# Altium PCB ice.PcbDoc (part 1 of 2)
Units mm, origin at the board's own origin, x right, y up, seen from the top; angles counter-clockwise.
Board outline 65 x 30 mm, 4 copper layers (Top Layer, GND, L3, Bottom Layer), stack 1.576 mm thick; 116 components, 101 nets, 444 pads, 153 vias.
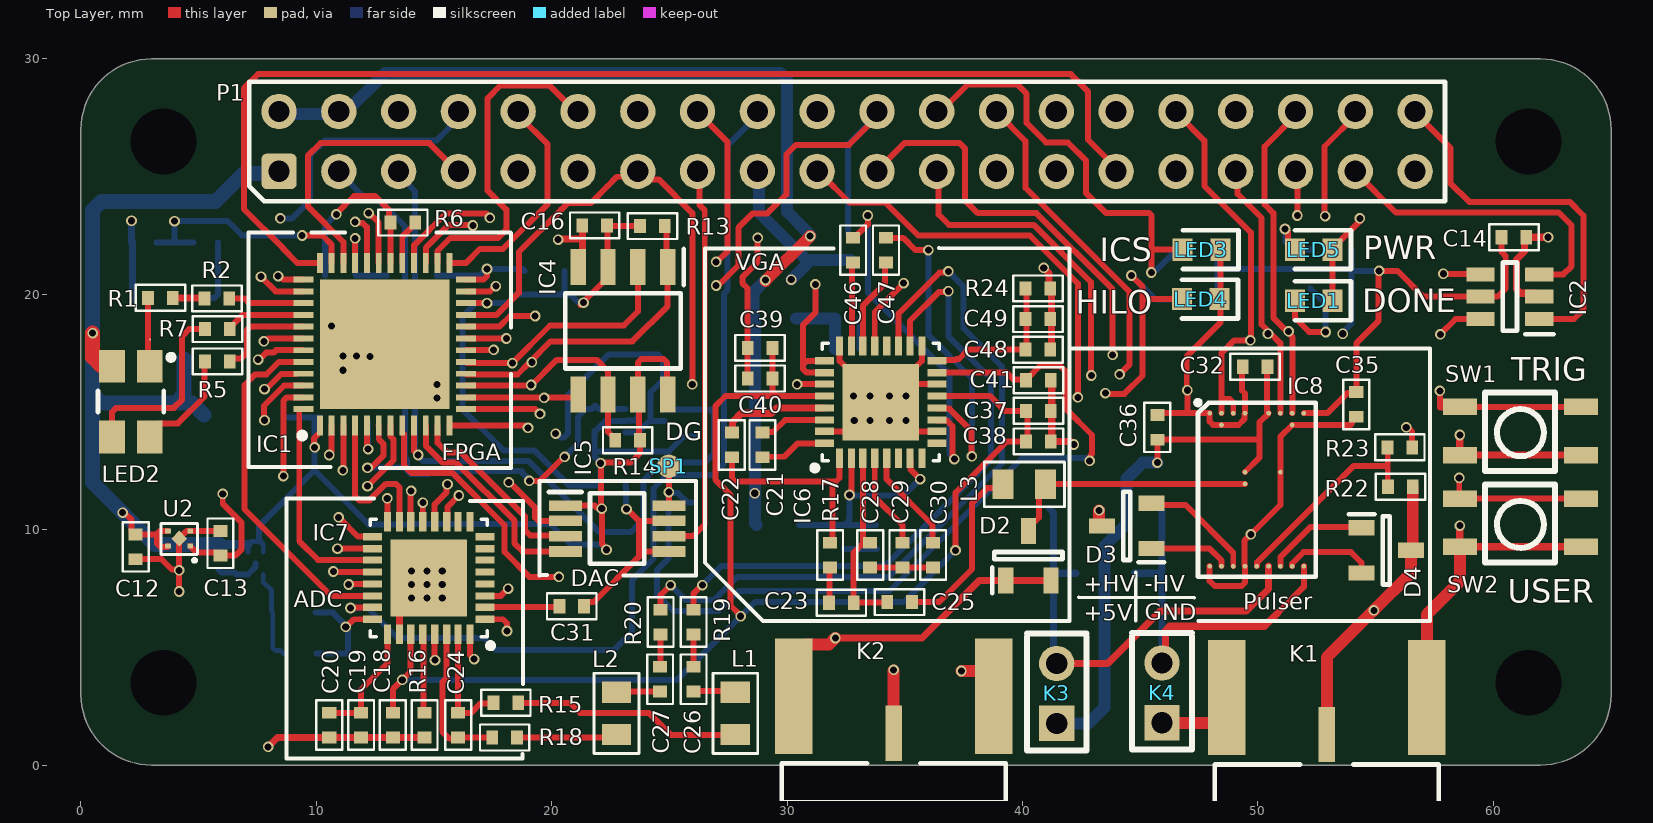
[diagram p0: Top Layer view]
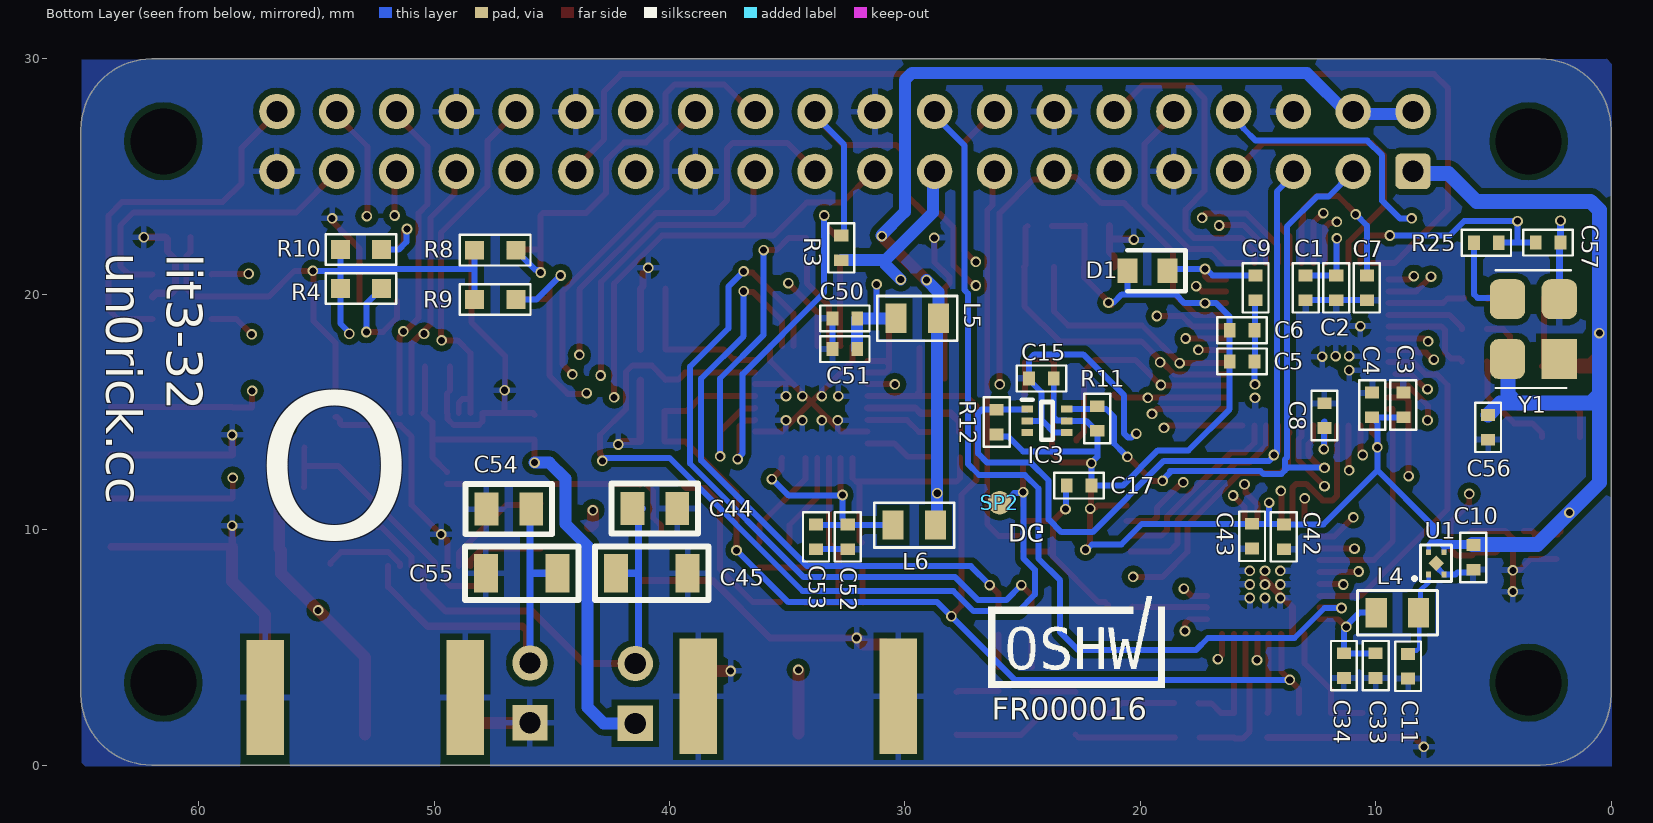
[diagram p1: Bottom Layer view, seen from below]
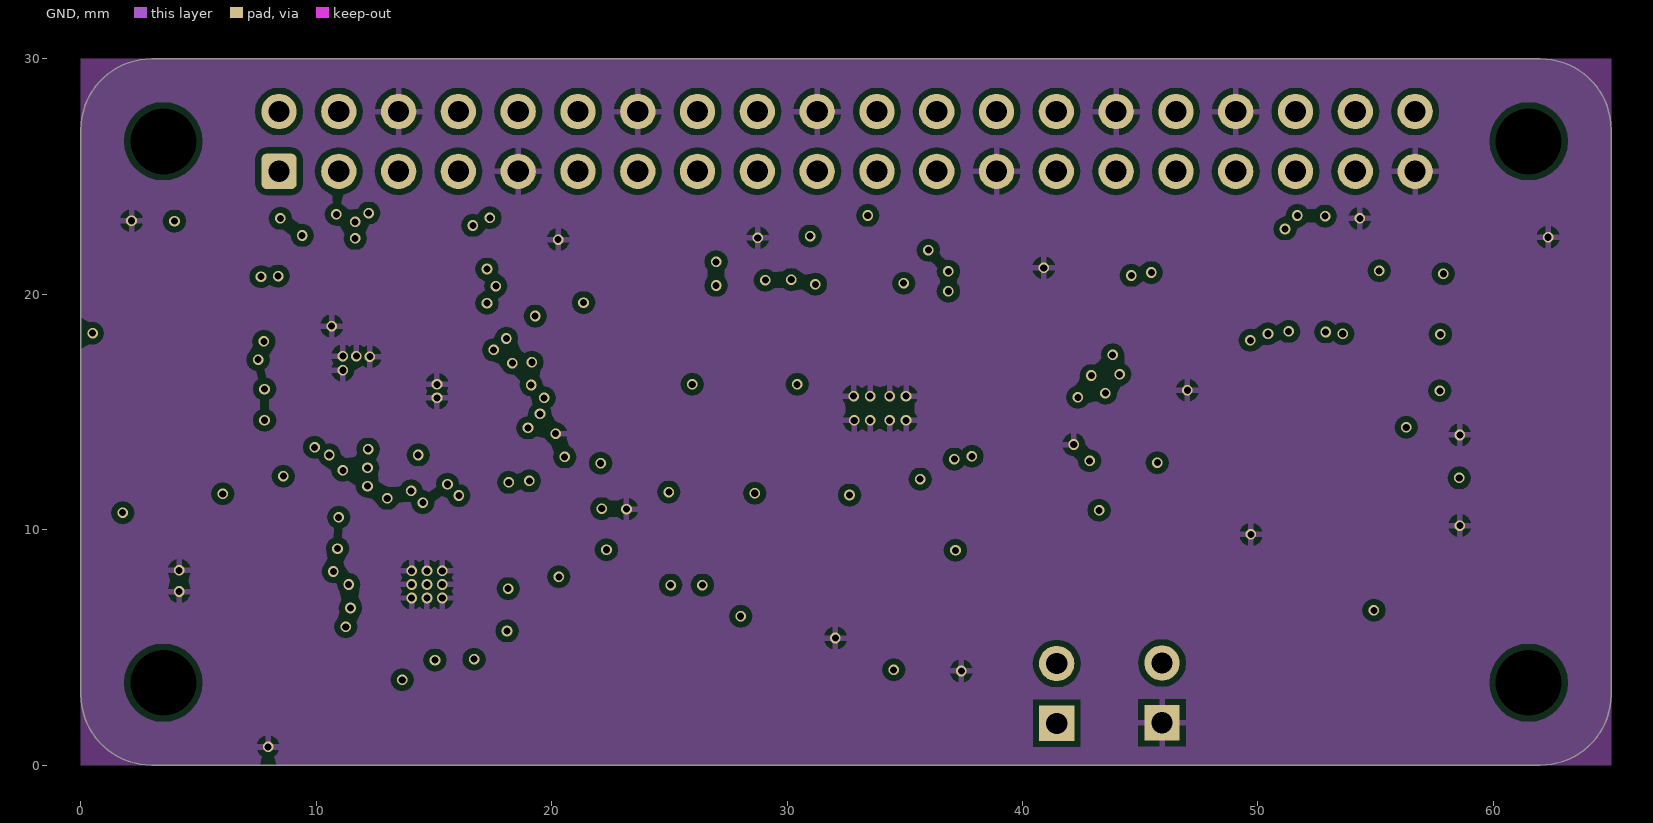
[diagram p2: GND]
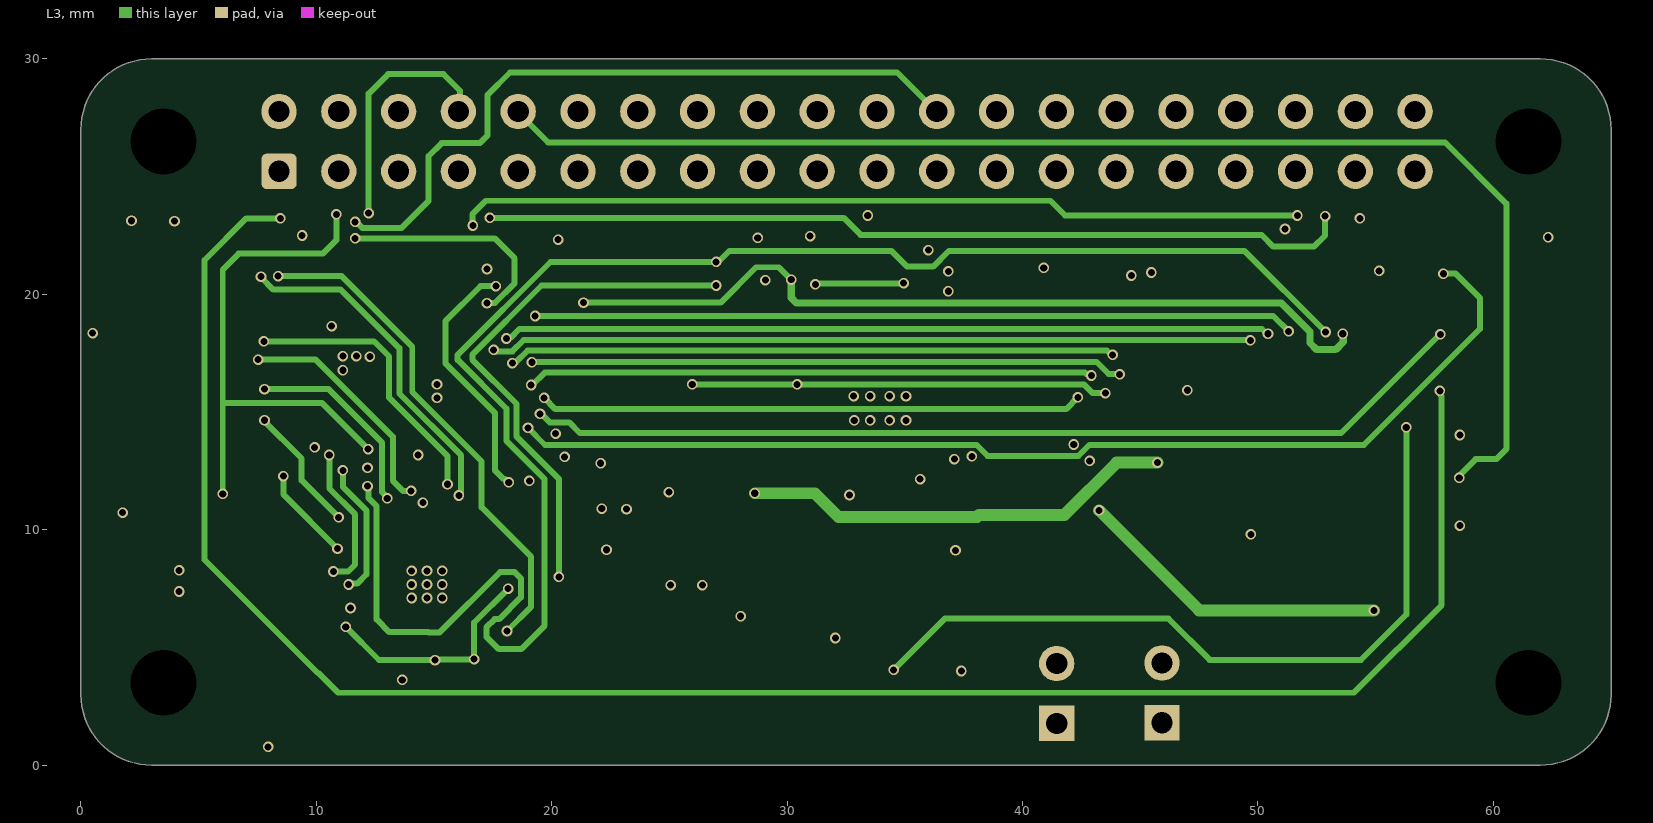
[diagram p3: L3]

## Layer stack, top to bottom
Top Solder: solder mask 0.0102, Solder Resist, Dk 3.5
Top Layer: signal copper 0.0356
Dielectric 2: prepreg 0.1524, PP-018, Dk 4.3
GND: signal copper 0.035
Dielectric 1: dielectric 1.13, FR-4, Dk 4.8
L3: signal copper 0.035
Dielectric 3: prepreg 0.1524, PP-018, Dk 4.3
Bottom Layer: signal copper 0.0356
Bottom Solder: solder mask 0.0102, Solder Resist, Dk 3.5

## Board outline
0,3 0,27 cw(c3,27) 3,30 62,30 cw(c62,27) 65,27 65,3 cw(c62,3) 62,0 3,0 cw(c3,3)

## Design rules (kind name [scope] priority, off if disabled: settings)
Clearance Clearance_3 [InPolygon] p1: gap=0.254 ignorepadtopadclearanceinfootprint=FALSE
Clearance [All] p2: gap=0.18 ignorepadtopadclearanceinfootprint=FALSE except(0: Arc-Hole Track-Hole SMDPad-Hole THPad-Hole Via-Hole Fill-Hole Poly-Hole Region-Hole Text-Hole; 0.1: Arc-SMDPad Track-SMDPad SMDPad-SMDPad; 0.129: Arc-Via Track-Via)
ComponentClearance [All] p1: gap=0.1 collisioncheckmode=3 verticalgap=0.1 showdistances=FALSE
HoleSize [All] p1 off: absolutevalues=TRUE maxlimit=2.54 minlimit=0.025 maxpercent=80.000 minpercent=20.000
MinimumSolderMaskSliver [All] p1: minsoldermaskwidth=0
PasteMaskExpansion [All] p1: expansion=0.05
PolygonConnect PolygonConnect_1 [All] p1: connectstyle=Relief reliefconductorwidth=0.254 reliefentries=4 polygonreliefangle="90 Angle" airgapwidth=0.254
RoutingVias [All] p1: holewidth=0.3 width=0.45 viastyle="Through Hole" minholewidth=0.3 minwidth=0.45 maxholewidth=0.3 maxwidth=0.45
SilkToSilkClearance [All] p1: silktosilkclearance=0
SolderMaskExpansion [All] p1: expansion=0.102 istentingtop=FALSE
Width [All] p1: maxlimit=3.048 minlimit=0.18 preferedwidth=0.18
25 further rules are at their usual default settings.

## Components (designator, comment, footprint, x,y, rotation, side; value= is the part's Value field where it differs from the comment)
C1 "cap0402" SM0402_3D_cap 12.975,20.275 r90 bottom value=100n
C2 "cap0402" SM0402_3D_cap 11.675,20.275 r90 bottom value=10u
C3 "cap0402" SM0402_3D_cap 8.825,15.3 r270 bottom value=100n
C4 "cap0402" SM0402_3D_cap 10.15,15.3 r270 bottom value=10u
C5 "cap0402" SM0402_3D_cap 15.675,17.15 r0 bottom value=100n
C6 "cap0402" SM0402_3D_cap 15.675,18.475 r0 bottom value=10u
C7 "cap0402" SM0402_3D_cap 10.375,20.275 r90 bottom value=100n
C8 "cap0402" SM0402_3D_cap 12.175,14.85 r270 bottom value=100n
C9 "cap0402" SM0402_3D_cap 15.1,20.275 r90 bottom value=100n
C10 "cap0402" SM0402_3D_cap 5.85,8.825 r90 bottom value=100n
C11 "cap0402" SM0402_3D_cap 8.625,4.2 r90 bottom value=1u
C12 "cap0402" SM0402_3D_cap 2.325,9.275 r90 top value=100n
C13 "cap0402" SM0402_3D_cap 5.925,9.425 r270 top value=1u
C14 "cap0402" SM0402_3D_cap 60.875,22.425 r0 top value=100n
C15 "cap0402" SM0402_3D_cap 24.2,16.425 r0 bottom value=100n
C16 "cap0402" SM0402_3D_cap 21.825,22.925 r180 top value=100n
C17 "cap0402" SM0402_3D_cap 22.6,11.875 r180 bottom value=100n
C18 "cap0402" SM0402_3D_cap 13.25,1.7 r270 top value=100n
C19 "cap0402" SM0402_3D_cap 11.9,1.7 r270 top value=100n
C20 "cap0402" SM0402_3D_cap 10.55,1.7 r270 top value=10u
C21 "cap0402" SM0402_3D_cap 28.95,13.6 r270 top value=100n
C22 "cap0402" SM0402_3D_cap 27.65,13.6 r270 top value=100n
C23 "cap0402" SM0402_3D_cap 32.3,6.9 r180 top value=18n
C24 "cap0402" SM0402_3D_cap 16.025,1.7 r90 top value=18p
C25 "cap0402" SM0402_3D_cap 34.775,6.925 r0 top value=100n
C26 "cap0402" SM0402_3D_cap 26.025,3.65 r90 top value=100n
C27 "cap0402" SM0402_3D_cap 24.6,3.65 r90 top value=100n
C28 "cap0402" SM0402_3D_cap 33.525,8.925 r270 top value=22p
C29 "cap0402" SM0402_3D_cap 34.9,8.925 r270 top value=100n
C30 "cap0402" SM0402_3D_cap 36.2,8.925 r270 top value=100n
C31 "cap0402" SM0402_3D_cap 20.85,6.75 r0 top value=100n
C32 "cap0402" SM0402_3D_cap 49.875,16.925 r180 top value=100n
C33 "cap0402" SM0402_3D_cap 10,4.225 r90 bottom value=100n
C34 "cap0402" SM0402_3D_cap 11.35,4.225 r90 bottom value=10u
C35 "cap0402" SM0402_3D_cap 54.175,15.325 r270 top value=100n
C36 "cap0402" SM0402_3D_cap 45.725,14.35 r90 top value=100n
C37 "cap0402" SM0402_3D_cap 40.675,15.05 r180 top value=100n
C38 "cap0402" SM0402_3D_cap 40.675,13.75 r180 top value=1n
C39 "cap0402" SM0402_3D_cap 28.85,17.725 r0 top value=100n
C40 "cap0402" SM0402_3D_cap 28.85,16.425 r0 top value=1n
C41 "cap0402" SM0402_3D_cap 40.675,16.35 r180 top value=1n
C42 "cap0402" SM0402_3D_cap 13.9,9.7 r90 bottom value=100n
C43 "cap0402" SM0402_3D_cap 15.25,9.725 r90 bottom value=10u
C44 "cap0805" SM0805 39.67,10.9 r0 bottom value=0.1x200V
C45 "cap1206" SM1206 39.227,8.15 r0 bottom value=0.1x200V
C46 "cap0402" SM0402_3D_cap 32.8,21.875 r270 top value=100n
C47 "cap0402" SM0402_3D_cap 34.2,21.875 r270 top value=100n
C48 "cap0402" SM0402_3D_cap 40.65,17.65 r180 top value=100n
C49 "cap0402" SM0402_3D_cap 40.65,18.95 r180 top value=1n
C50 "cap0402" SM0402_3D_cap 32.55,18.975 r180 bottom value=100n
C51 "cap0402" SM0402_3D_cap 32.55,17.675 r180 bottom value=1n
C52 "cap0402" SM0402_3D_cap 32.425,9.7 r90 bottom value=100n
C53 "cap0402" SM0402_3D_cap 33.775,9.7 r90 bottom value=1n
C54 "cap0805" SM0805 45.87,10.875 r0 bottom value=0.1x200V
C55 "cap1206" SM1206 44.75,8.15 r0 bottom value=0.1x200V
C56 "cap0402" SM0402_3D_cap 5.225,14.35 r270 bottom value=100n
C57 "cap0402" SM0402_3D_cap 2.675,22.2 r180 bottom value=6p8
D1 "CDBU0520" DIOC1709X85N 19.7,21 r0 bottom
D2 "MMBD7000HS-7-F" SOT96P240X110-3N 40.25,8.9 r90 top
D3 "MMBD7000HS-7-F" SOT96P240X110-3N 44.425,10.16 r180 top
D4 "MMBD7000HS-7-F" SOT96P240X110-3N 55.45,9.125 r0 top
IC1 "ICE40UP5K-SG48ITR" QFN50P700X700X100-49N-D 12.9,17.875 r90 top
IC2 "SN74LVC2G17DBVR" SOT95P280X145-6N 60.7,19.9 r180 top
IC3 "TMP112AIDRLR" SOTFL50P160X60-6N 23.962,14.625 r180 bottom
IC4 "W25X10CLSNIG" SOIC127P600X175-8N 23.025,18.45 r270 top
IC5 "MCP4812-E_MS" SOP65P490X110-8N 22.775,10.05 r0 top
IC6 "AD8332ACPZ-R7" QFN50P500X500X100-33N 33.975,15.425 r90 top
IC7 "AD9629BCPZ-65" QFN50P500X500X100-33N 14.775,7.95 r180 top
IC8 "HV7361GA-G" BGA22C50P9X14_500X700X105 49.95,11.7 r0 top
K1 "SMA_Edge" AMPHENOL_132357-11 52.925,1.3 r90 top
K2 "SMA_Edge" AMPHENOL_132357-11 34.525,1.35 r90 top
K3 "1x2PLS" JUMPER2 41.45,1.775 r180 top
K4 "1x2PLS" JUMPER2 45.925,1.8 r180 top
L1 "75R@100MHz" "SM_0805_INDUCTANCE _3D" 27.8,2.2 r270 top
L2 "75R@100MHz" "SM_0805_INDUCTANCE _3D" 22.75,2.2 r270 top
L3 "75R@100MHz" "SM_0805_INDUCTANCE _3D" 40.075,11.925 r180 top
L4 "75R@100MHz" "SM_0805_INDUCTANCE _3D" 9.075,6.475 r180 bottom
L5 "75R@100MHz" "SM_0805_INDUCTANCE _3D" 29.475,18.975 r180 bottom
L6 "75R@100MHz" "SM_0805_INDUCTANCE _3D" 29.6,10.2 r0 bottom
LED1 "HSMW-C191" LEDC1608X70N 52.375,19.725 r180 top
LED2 "CLVBA-FKA-CAEDH8BBB7A363" CLVBAFKACAEDH8BBB7A363 2.125,15.445 r270 top
LED3 "HSMW-C191" LEDC1608X70N 47.6,21.9 r180 top
LED4 "HSMW-C191" LEDC1608X70N 47.575,19.8 r180 top
LED5 "HSMW-C191" LEDC1608X70N 52.375,21.9 r180 top
P1 "2x20 2.54mm vertical" PLD-40 32.545,26.495 r0 top
R1 "100" SM0402_3D_res 3.375,19.85 r0 top value=4k7
R2 "100" SM0402_3D_res 5.775,19.825 r0 top value=4k7
R3 "10k" SM0402_3D_res 32.7,21.975 r90 bottom value=4k7
R4 "1k" SM0603_3D_res 53.1,20.25 r0 bottom value=4k7
R5 "100" SM0402_3D_res 5.8,17.15 r0 top value=4k7
R6 "100" SM0402_3D_res 13.675,23.05 r0 top value=4k7
R7 "100" SM0402_3D_res 5.8,18.525 r0 top value=4k7
R8 "1k" SM0603_3D_res 47.4,21.875 r0 bottom value=4k7
R9 "1k" SM0603_3D_res 47.4,19.775 r0 bottom value=4k7
R10 "1k" SM0603_3D_res 53.1,21.9 r0 bottom value=4k7
R11 "4k7" SM0402_3D_res 21.825,14.725 r90 bottom
R12 "4k7" SM0402_3D_res 26.1,14.575 r90 bottom
R13 "4k7" SM0402_3D_res 24.275,22.9 r180 top
R14 "4k7" SM0402_3D_res 23.225,13.8 r180 top
R15 "158" SM0402_3D_res 18.05,2.65 r180 top value=4k7
R16 "10k" SM0402_3D_res 14.6,1.7 r270 top value=4k7
R17 "280" SM0402_3D_res 31.825,8.925 r270 top value=4k7
R18 "158" SM0402_3D_res 18,1.175 r180 top value=4k7
R19 "84,5" SM0402_3D_res 26.025,6.075 r270 top value=4k7
R20 "84,5" SM0402_3D_res 24.625,6.075 r270 top value=4k7
R22 "0R" SM0402_3D_res 56.05,11.825 r180 top value=4k7
R23 "0R" SM0402_3D_res 56.025,13.5 r0 top value=4k7
R24 "11k" SM0402_3D_res 40.65,20.25 r180 top value=4k7
R25 "10" SM0402_3D_res 5.3,22.193 r0 bottom value=4k7
SP1 "SolderPad D1mm_round" "SolderPad_D1mm _round" 24.975,12.7 r90 top value=DAC_GAIN
SP2 "SolderPad D1mm_round" "SolderPad_D1mm _round" 25.975,11.15 r90 bottom value=DAC_GAIN
SW1 "EVQ-P9P02M" "Button 4.7x3.5 _SMT" 58.575,13.173 r90 top
SW2 "EVQ-P9P02M" "Button 4.7x3.5 _SMT" 58.575,9.275 r90 top
U1 "TLV70718PDQNR" "X2SON - 2" 7.425,8.575 r90 bottom
U2 "TLV70712PDQNR" "X2SON - 2" 4.175,9.625 r180 top
Y1 "ASFL1-25.000MHZ-L-T" ASFL125000MHZLT 3.3,18.521 r90 bottom

## Footprints (in the part's own frame and the unit in brackets; to place one, negate y for a bottom-side part, rotate by r counter-clockwise, add the part's x,y. Pads: shape width x height; smd on the part's side, far side on the other; paste and mask are expansions set on the pad)
AMPHENOL_132357-11 [mm]
  rect 2.35x0.7 smd: 1(0,0)
  rect 4.9x1.6 smd: 2(1.575,4.25) 2(1.575,-4.25)
  rect 4.9x1.6 smd far side: 2(1.575,4.25) 2(1.575,-4.25)
  silkscreen extent -10.81,-4.76 -1.28,4.76, body extent -10.8,-4.76 3.48,4.76, height 4.08
ASFL125000MHZLT [mm]
  rect 1.7x1.5 smd: 1(-1.27,-1.1)
  rrect50% 1.7x1.5 smd: 2(1.27,-1.1) 3(1.27,1.1) 4(-1.27,1.1)
  silkscreen extent -2.5,-1.6 2.5,1.6, body extent -2.5,-1.7 2.5,1.7, height 1.4
BGA22C50P9X14_500X700X105 [mm]
  round 0.2 smd: A1(-2,3.25) A2(-1.5,3.25) A3(-1,3.25) A4(-0.5,3.25) A6(0.5,3.25) A7(1,3.25) A8(1.5,3.25) A9(2,3.25) B2(-1.5,2.75) B8(1.5,2.75) F4(-0.5,0.75) F7(1,0.75) G4(-0.5,0.25) P1(-2,-3.25) P2(-1.5,-3.25) P3(-1,-3.25) P4(-0.5,-3.25) P5(0,-3.25) P6(0.5,-3.25) P7(1,-3.25) P8(1.5,-3.25) P9(2,-3.25)
  silkscreen extent -2.6,-3.7 2.5,3.8, body extent -2.5,-3.5 2.5,3.5, height 1.05
"Button 4.7x3.5 _SMT" [mm] "EVQ-P9P02M_SMT"
  rect 0.7x1.45 smd: 1(0,0) 2(0,-5.15) 3(2.05,0) 4(2.05,-5.15)
  silkscreen extent -0.67,-4.05 2.65,-1.07
CLVBAFKACAEDH8BBB7A363 [mm]
  rect 1.4x1.1 smd: 1(-1.5,0.8) 2(-1.5,-0.8) 3(1.5,0.8) 4(1.5,-0.8)
  silkscreen extent -2.66,-1.4 0.45,1.4, body extent -1.6,-1.4 1.6,1.4, height 2.2
DIOC1709X85N [mm]
  rect 0.85x1.05 smd: 1(-0.85,0) 2(0.85,0)
  silkscreen extent -1.63,-0.87 0.85,0.87, body extent -0.85,-0.45 0.85,0.45, height 0.85
JUMPER2 [mm]
  rect 1.5x1.5 hole 0.9: 1(0,0)
  round 1.5 hole 0.9: 2(0,-2.54)
  silkscreen extent -1.27,-3.81 1.27,1.14
LEDC1608X70N [mm]
  rect 0.85x0.95 smd: 1(-0.8,0) 2(0.8,0)
  silkscreen extent -1.58,-0.82 0.8,0.82
PLD-40 [mm]
  rrect30% 1.5x1.5 hole 0.9: 1(-24.13,-1.27)
  round 1.5 hole 0.9: 2(-24.13,1.27) 3(-21.59,-1.27) 4(-21.59,1.27) 5(-19.05,-1.27) 6(-19.05,1.27) 7(-16.51,-1.27) 8(-16.51,1.27) 9(-13.97,-1.27) 10(-13.97,1.27) 11(-11.43,-1.27) 12(-11.43,1.27) 13(-8.89,-1.27) 14(-8.89,1.27) 15(-6.35,-1.27) 16(-6.35,1.27) 17(-3.81,-1.27) 18(-3.81,1.27) 19(-1.27,-1.27) 20(-1.27,1.27) 21(1.27,-1.27) 22(1.27,1.27) 23(3.81,-1.27) 24(3.81,1.27) 25(6.35,-1.27) 26(6.35,1.27) 27(8.89,-1.27) 28(8.89,1.27) 29(11.43,-1.27) 30(11.43,1.27) 31(13.97,-1.27) 32(13.97,1.27) 33(16.51,-1.27) 34(16.51,1.27) 35(19.05,-1.27) 36(19.05,1.27) 37(21.59,-1.27) 38(21.59,1.27) 39(24.13,-1.27) 40(24.13,1.27)
  silkscreen extent -25.4,-2.54 25.4,2.54, body extent -25.4,-2.54 25.4,2.54, height 8.54
QFN50P500X500X100-33N [mil]
  rect 32x12 smd: 1(-94,69) 2(-94,49) 3(-94,30) 4(-94,10) 5(-94,-10) 6(-94,-30) 7(-94,-49) 8(-94,-69) 17(94,-69) 18(94,-49) 19(94,-30) 20(94,-10) 21(94,10) 22(94,30) 23(94,49) 24(94,69)
  rect 12x32 smd: 9(-69,-94) 10(-49,-94) 11(-30,-94) 12(-10,-94) 13(10,-94) 14(30,-94) 15(49,-94) 16(69,-94) 25(69,94) 26(49,94) 27(30,94) 28(10,94) 29(-10,94) 30(-30,94) 31(-49,94) 32(-69,94)
  rect 128x128 smd: 33(0,0)
  silkscreen extent -98,-98 98,98
QFN50P700X700X100-49N-D [mm]
  rect 0.85x0.25 smd: 1(-3.45,2.75) 2(-3.45,2.25) 3(-3.45,1.75) 4(-3.45,1.25) 5(-3.45,0.75) 6(-3.45,0.25) 7(-3.45,-0.25) 8(-3.45,-0.75) 9(-3.45,-1.25) 10(-3.45,-1.75) 11(-3.45,-2.25) 12(-3.45,-2.75) 25(3.45,-2.75) 26(3.45,-2.25) 27(3.45,-1.75) 28(3.45,-1.25) 29(3.45,-0.75) 30(3.45,-0.25) 31(3.45,0.25) 32(3.45,0.75) 33(3.45,1.25) 34(3.45,1.75) 35(3.45,2.25) 36(3.45,2.75)
  rect 0.25x0.85 smd: 13(-2.75,-3.45) 14(-2.25,-3.45) 15(-1.75,-3.45) 16(-1.25,-3.45) 17(-0.75,-3.45) 18(-0.25,-3.45) 19(0.25,-3.45) 20(0.75,-3.45) 21(1.25,-3.45) 22(1.75,-3.45) 23(2.25,-3.45) 24(2.75,-3.45) 37(2.75,3.45) 38(2.25,3.45) 39(1.75,3.45) 40(1.25,3.45) 41(0.75,3.45) 42(0.25,3.45) 43(-0.25,3.45) 44(-0.75,3.45) 45(-1.25,3.45) 46(-1.75,3.45) 47(-2.25,3.45) 48(-2.75,3.45)
  rect 5.5x5.5 smd: 49(0,0)
  silkscreen extent -4,3.37 -3.75,3.62, body extent -3.55,-3.55 3.55,3.55, height 1
SM0402_3D_cap [mm] "0402 cap"
  rect 0.5x0.6 smd: 1(-0.525,0) 2(0.525,0)
  silkscreen extent -1.05,-0.55 1.05,0.55, body extent -0.53,-0.25 0.53,0.25, height 0.4
SM0402_3D_res [mm] "0603 inch resistor"
  rect 0.5x0.6 smd: 1(-0.525,0) 2(0.525,0)
  silkscreen extent -1.05,-0.55 1.05,0.55, body extent -0.53,-0.25 0.53,0.25, height 0.4
SM0603_3D_res [mm] "0603 inch resistor"
  rect 0.8x0.8 smd: 1(-0.875,0) 2(0.875,0)
  silkscreen extent -1.5,-0.65 1.5,0.65, body extent -0.87,-0.47 0.88,0.48, height 0.55
SM0805 [mil]
  rect 40x55 smd: 1(0,0) 2(75,0)
  silkscreen extent -35,-42 110,42
SM1206 [mil]
  rect 40x65 smd: 1(0,0) 2(120,0)
  silkscreen extent -35,-45 155,45
"SM_0805_INDUCTANCE _3D" [mm] "chip inductanse 0805 inch"
  rect 0.9x1.25 smd: 1(-0.9,0) 2(0.9,0)
  silkscreen extent -1.7,-0.95 1.7,0.95, body extent -1.1,-0.7 1.1,0.7, height 1.1
SOIC127P600X175-8N [mm]
  rect 1.525x0.65 smd: 1(-2.712,1.905) 2(-2.712,0.635) 3(-2.712,-0.635) 4(-2.712,-1.905) 5(2.712,-1.905) 6(2.712,-0.635) 7(2.712,0.635) 8(2.712,1.905)
  silkscreen extent -3.47,-2.45 1.6,2.58, body extent -3,-2.45 3,2.45, height 1.75
"SolderPad_D1mm _round" [mm] "7mm solder circle for finger touch"
  round 1 smd: 1(0,0)
SOP65P490X110-8N [mm]
  rect 1.4x0.45 smd: 1(-2.2,0.975) 2(-2.2,0.325) 3(-2.2,-0.325) 4(-2.2,-0.975) 5(2.2,-0.975) 6(2.2,-0.325) 7(2.2,0.325) 8(2.2,0.975)
  silkscreen extent -2.9,-1.5 1.15,1.55, body extent -2.45,-1.5 2.45,1.5, height 1.1
SOT95P280X145-6N [mm]
  rect 1.2x0.6 smd: 1(-1.25,0.95) 2(-1.25,0) 3(-1.25,-0.95) 4(1.25,-0.95) 5(1.25,0) 6(1.25,0.95)
  silkscreen extent -1.85,-1.45 0.3,1.6, body extent -1.4,-1.45 1.4,1.45, height 1.45
SOT96P240X110-3N [mm]
  rect 1.1x0.65 smd: 1(-1.05,0.96) 2(-1.05,-0.96) 3(1.05,0)
  silkscreen extent -1.6,-1.45 0.15,1.54, body extent -1.2,-1.45 1.2,1.45, height 1.1
SOTFL50P160X60-6N [mm]
  rect 0.475x0.3 smd: 1(-0.838,0.5) 2(-0.838,0) 3(-0.838,-0.5) 4(0.838,-0.5) 5(0.838,0) 6(0.838,0.5)
  silkscreen extent -1.07,-0.8 0.25,0.9, body extent -0.8,-0.8 0.8,0.8, height 0.6
"X2SON - 2" [mm] "DQN, X2SON"
  rect 0.24x0.21 smd paste+0 mask+0.08: 1(-0.475,0.325) 2(-0.475,-0.325) 3(0.475,-0.325) 4(0.475,0.325)
  rect 0.48x0.48 smd rot 45 mask+0.075: 5(0,0)
  silkscreen extent -0.77,-0.65 0.78,0.99, body extent -0.58,-0.55 0.57,0.63, height 0.9

## Part data
C1 C2 C3 C4 C5 C6 C7 C8 C9 C10 C11 C12 C13 C14 C15 C16 C17 C18 C19 C20 C21 C22 C23 C24 C25 C26 C27 C28 C29 C30 C31 C32 C33 C34 C35 C36 C37 C38 C39 C40 C41 C42 C43 C46 C47 C48 C49 C50 C51 C52 C53 C56 C57: "Capacitor  0402 inch", LatestRevisionDate=17-Jul-2002, LatestRevisionNote="Re-released for DXP Platform.", PackageDescription="Radial Cap, Thru-Hole; 2 Leads; 0.3 in Pin Spacing", PackageReference=RAD-0.3, Published=8-Jun-2000, Publisher="Altium Limited"
C44 C45 C54 C55: "Capacitor", LatestRevisionDate=17-Jul-2002, LatestRevisionNote="Re-released for DXP Platform.", PackageDescription="Radial Cap, Thru-Hole; 2 Leads; 0.3 in Pin Spacing", PackageReference=RAD-0.3, Published=8-Jun-2000, Publisher="Altium Limited"
D1: "Schottky Diode", Manufacturer_Name="Comchip Technology", Mouser Part Number=750-CDBU0520, Arrow Part Number=CDBU0520, Arrow Price/Stock=https://www.arrow.com/en/products/cdbu0520/comchip-technology, Datasheet Link=http://www.comchiptech.com/admin/files/product/CDBU0520-HF-RevA797161.pdf, Height=0.85mm, Manufacturer_Part_Number=CDBU0520, Mouser Price/Stock=https://www.mouser.co.uk/ProductDetail/Comchip-Technology/CDBU0520/?qs=QrYNfmA0esYvGSGDalbccA%3D%3D
D2 D3 D4: "Diode", Manufacturer_Name="Diodes Inc.", Mouser Part Number=621-MMBD7000HS-7-F, Arrow Part Number=MMBD7000HS-7-F, Arrow Price/Stock=https://www.arrow.com/en/products/mmbd7000hs-7-f/diodes-incorporated, Datasheet Link=https://www.diodes.com/assets/Datasheets/ds31782.pdf, Height=1.1mm, Manufacturer_Part_Number=MMBD7000HS-7-F, Mouser Price/Stock=https://www.mouser.co.uk/ProductDetail/Diodes-Incorporated/MMBD7000HS-7-F/?qs=4YT44p7w2bs7ic313M4gfA%3D%3D
IC1: "Integrated Circuit", Manufacturer_Name="Lattice Semiconductor", Mouser Part Number=842-40UP5KSG48ITR, Arrow Part Number=ICE40UP5K-SG48ITR, Arrow Price/Stock=https://www.arrow.com/en/products/ice40up5k-sg48itr/lattice-semiconductor, Datasheet Link=https://www.arrow.com/en/products/ice40up5k-sg48itr/lattice-semiconductor, Height=1mm, Manufacturer_Part_Number=ICE40UP5K-SG48ITR, Mouser Price/Stock=https://www.mouser.com/Search/Refine.aspx?Keyword=842-40UP5KSG48ITR
IC2: "Integrated Circuit", Manufacturer_Name="Texas Instruments", Mouser Part Number=595-SN74LVC2G17DBVR, Arrow Part Number=SN74LVC2G17DBVR, Arrow Price/Stock=https://www.arrow.com/en/products/sn74lvc2g17dbvr/texas-instruments, Datasheet Link=http://www.ti.com/lit/gpn/sn74lvc2g17, Height=1.45mm, Manufacturer_Part_Number=SN74LVC2G17DBVR, Mouser Price/Stock=https://www.mouser.co.uk/ProductDetail/Texas-Instruments/SN74LVC2G17DBVR/?qs=X1HXWTtiZ0RnstCufGEJxQ%3D%3D
IC3: "Integrated Circuit", Manufacturer_Name="Texas Instruments", Mouser Part Number=595-TMP112AIDRLR, Arrow Part Number=TMP112AIDRLR, Arrow Price/Stock=https://www.arrow.com/en/products/tmp112aidrlr/texas-instruments, Datasheet Link=http://www.ti.com/general/docs/suppproductinfo.tsp?distId=10&gotoUrl=http%3A%2F%2Fwww.ti.com%2Flit%2Fgpn%2Ftmp112, Height=0.6mm, Manufacturer_Part_Number=TMP112AIDRLR, Mouser Price/Stock=https://www.mouser.co.uk/ProductDetail/Texas-Instruments/TMP112AIDRLR/?qs=62Z1lCHpKYghtK4%2FJn2ysA%3D%3D
IC4: "Integrated Circuit", Manufacturer_Name=Winbond, Mouser Part Number=454-W25X10CLSNIG, Arrow Part Number=W25X10CLSNIG, Arrow Price/Stock=https://www.arrow.com/en/products/w25x10clsnig/winbond-electronics, Datasheet Link=https://www.arrow.com/en/products/w25x10clsnig/winbond-electronics, Height=1.75mm, Manufacturer_Part_Number=W25X10CLSNIG, Mouser Price/Stock=https://www.mouser.co.uk/ProductDetail/Winbond/W25X10CLSNIG?qs=qSfuJ%252Bfl%2Fd58%252Bc3wxS8Vmg%3D%3D
IC5: "Integrated Circuit", Arrow Part Number=MCP4812-E/MS, Manufacturer_Name=Microchip, Mouser Part Number=579-MCP4812-E/MS, Arrow Price/Stock=https://www.arrow.com/en/products/mcp4812-ems/microchip-technology, Datasheet Link=http://ww1.microchip.com/downloads/en/DeviceDoc/20002249B.pdf, Height=1.1mm, Manufacturer_Part_Number=MCP4812-E/MS, Mouser Price/Stock=https://www.mouser.com/Search/Refine.aspx?Keyword=579-MCP4812-E%2FMS
IC6: "Integrated Circuit", Manufacturer_Name="Analog Devices", Mouser Part Number=584-AD8332ACPZ-R7, Arrow Part Number=AD8332ACPZ-R7, Arrow Price/Stock=https://www.arrow.com/en/products/ad8332acpz-r7/analog-devices, Manufacturer_Part_Number=AD8332ACPZ-R7, Mouser Price/Stock=https://www.mouser.co.uk/ProductDetail/Analog-Devices/AD8332ACPZ-R7?qs=%2FtpEQrCGXCzEVqYW%252BWJwOA%3D%3D
IC7: "Integrated Circuit", Manufacturer_Name="Analog Devices", Mouser Part Number=584-AD9629BCPZ-65, Arrow Part Number=AD9629BCPZ-65, Arrow Price/Stock=https://www.arrow.com/en/products/ad9629bcpz-65/analog-devices, Manufacturer_Part_Number=AD9629BCPZ-65, Mouser Price/Stock=https://www.mouser.co.uk/ProductDetail/Analog-Devices/AD9629BCPZ-65?qs=BpaRKvA4VqGjvk9AFyB3jg%3D%3D
IC8: "Integrated Circuit", Manufacturer_Name=Microchip, Mouser Part Number=579-HV7361GA-G, Arrow Part Number=HV7361GA-G, Arrow Price/Stock=https://www.arrow.com/en/products/hv7361ga-g/microchip-technology, Datasheet Link=http://ww1.microchip.com/downloads/en/DeviceDoc/20005570C.pdf, Height=1.05mm, Manufacturer_Part_Number=HV7361GA-G, Mouser Price/Stock=https://www.mouser.co.uk/ProductDetail/Microchip-Technology/HV7361GA-G?qs=NoqMqJKvPFJ98Yl1cb744A%3D%3D
L1 L2 L3 L4 L5 L6: "chip inductance", Case=0805, Manufacturer=MURATA, Manufacturer Part Number=BLM21BB750SN1D, Part Number=IND0805_MURATA_BLM21BB750SN1D, Power=700mA, Resistance=0.16R, Tolerance=±25%, Author="S. Jafar", Component Type=Standard, ComponentHeight=1.05mm, CreateDate=12/21/2015, LatestRevisionDate=12/21/2015, Mounted=Yes, Part Description="SMD EMIFIL Suppression Chip Ferrite Bead", Pin Count=2, SMD=Yes, Socket=No, Status=None, Table="Inductors SMD"
LED1 LED3 LED4 LED5: "LED", Manufacturer_Name="Avago Technologies", Mouser Part Number=630-HSMW-C191, Datasheet Link=https://docs.broadcom.com/docs/AV02-0186EN, Height=0.7mm, Manufacturer_Part_Number=HSMW-C191, Mouser Price/Stock=https://www.mouser.com/Search/Refine.aspx?Keyword=630-HSMW-C191
LED2: "LED", Manufacturer_Name=Cree, Mouser Part Number=941-VBAFKACAEDH8B7A3, Arrow Part Number=CLVBA-FKA-CAEDH8BBB7A363, Arrow Price/Stock=https://www.arrow.com/en/products/clvba-fka-caedh8bbb7a363/cree, Datasheet Link=http://www.cree.com/led-components/media/documents/ds-CLVBA-FKA.pdf, Height=2.1mm, Manufacturer_Part_Number=CLVBA-FKA-CAEDH8BBB7A363, Mouser Price/Stock=https://www.mouser.co.uk/ProductDetail/Cree-Inc/CLVBA-FKA-CAEDH8BBB7a363/?qs=3AcK5DacLboXYkg4biCgSA%3D%3D
P1: "Header, 40-Pin", LatestRevisionDate=17-Jul-2002, LatestRevisionNote="Re-released for DXP Platform.", Publisher="Altium Limited"
R1 R2 R3 R5 R6 R7 R11 R12 R13 R14 R15 R16 R17 R18 R19 R20 R22 R23 R24 R25: "Res_0402_EU", Case=1206, Manufacturer=GENERIC, Manufacturer1 ComponentHeight=0.65mm, Manufacturer1 Example="NIC COMPONENT", Manufacturer1 Part Number=NRC12F4701TRF, Manufacturer Part Number=R1206_4K7_1%_0.25W_100PPM, Power=0.25W, Tolerance=±1%, Author="CERN DEM JLC", Component Type=Standard, CreateDate=12/3/2007, HelpURL=\\cern.ch\dfs\Applications\Altium\Datasheets\R1206_NIC_NRC.pdf, LatestRevisionDate=3/13/2008, Mounted=Yes, Part Description="General Purpose Thick Film Chip Resistor", Part Number=R1206_4K7_1%_0.25W_100PPM, Pin Count=2, SMD=Yes, Socket=No, Status=Preferred, Table="Resistors SMD", TC=±100ppm/°C
R4 R8 R9 R10: "Res_0603_EU", Case=1206, Manufacturer=GENERIC, Manufacturer1 ComponentHeight=0.65mm, Manufacturer1 Example="NIC COMPONENT", Manufacturer1 Part Number=NRC12F4701TRF, Manufacturer Part Number=R1206_4K7_1%_0.25W_100PPM, Power=0.25W, Tolerance=±1%, Author="CERN DEM JLC", Component Type=Standard, CreateDate=12/3/2007, HelpURL=\\cern.ch\dfs\Applications\Altium\Datasheets\R1206_NIC_NRC.pdf, LatestRevisionDate=3/13/2008, Mounted=Yes, Part Description="General Purpose Thick Film Chip Resistor", Part Number=R1206_4K7_1%_0.25W_100PPM, Pin Count=2, SMD=Yes, Socket=No, Status=Preferred, Table="Resistors SMD", TC=±100ppm/°C
SP1 SP2: "for finger touch"
SW1 SW2: library part "Button 4.7x3.5 SMT"
U1 U2: "low drop LDO"
Y1: "Crystal or Oscillator", Manufacturer_Name=ABRACON, Mouser Part Number=815-ASFL1-25-L-T, Arrow Part Number=ASFL1-25.000MHZ-L-T, Arrow Price/Stock=https://www.arrow.com/en/products/asfl1-25.000mhz-l-t/abracon, Datasheet Link=https://componentsearchengine.com/Datasheets/1/ASFL1-25.000MHZ-L-T.pdf, Height=1.3mm, Manufacturer_Part_Number=ASFL1-25.000MHZ-L-T, Mouser Price/Stock=https://www.mouser.co.uk/ProductDetail/ABRACON/ASFL1-25000MHZ-L-T?qs=jv7ULIbIBgOiRkeuuil%252BKg%3D%3D

## Free pads (board coordinates)
  round 0 hole 2.8 unplated mask+1.8: 0(3.5,3.5) 0(3.5,26.5) 0(61.5,3.5) 0(61.5,26.5)

## Via types
v1: diameter 0.45, hole 0.3, Top Layer to Bottom Layer, 153 vias

## Nets (pads, with @x,y where several pads share a name; then routed paths per layer and width w, separated by ;. In a path a pad name is that pad's centre, name@x,y a point inside that pad or via, vN(x,y) a via of type N, cw(c..) or ccw(c..) an arc to the next point about the centre after c; other vN are vias at no path point)
0V9: C18.1 C37.2 C38.2 C39.2 C40.2 IC6.13 IC6.28 IC7.27 | length 57.5
  Top Layer w0.254: C18.1@13.25,2.225 13.25,3.225 v1(13.65,3.625) 14,3.975 14,5.549 IC7.27@14.013,5.562 ; v1@28,6.375 27.595,6.78 27.595,11.48 26.95,12.125 26.95,15.25 27.379,15.679 29.571,15.679 ; C39.2@29.375,17.725 29.375,15.875 29.571,15.679 ; IC6.28@31.587,15.679 29.571,15.679 ; IC6.13@36.363,15.679 38.621,15.679 39.25,15.05 40.2,15.05 40.2,13.75 39.325,13.75 37.15,11.575 v1(37.15,9.125)
  Bottom Layer w0.254: v1(13.65,3.625) 25.325,3.625 28.625,6.925 34.95,6.925 v1(37.15,9.125)
  other v1: 28.025,6.325
5VLNA: C52.2 C53.2 IC6.2 IC6.7 L6.2 | length 10.5
  Top Layer w0.254: v1@32.625,11.475 32.73,11.58 IC6.2@32.73,13.037 ; IC6.7@35.22,13.037 35.245,13.012 35.245,12.555 v1@35.575,12.225
  Bottom Layer w0.254: L6.2@30.5,10.2 C53.2@33.775,10.2 ; C52.2@32.425,10.225 32.475,10.225 32.598,10.348 32.598,10.398 32.65,10.45 v1(32.65,11.475) 32.675,11.45 34.925,11.45 35.625,12.15 v1(35.65,12.15)
5VVGA: C50.2 C51.2 IC6.21 IC6.25 IC6.26 L5.1 | length 17.1
  Top Layer w0.254: v1(31.2,20.425) 31.2,19.225 30.679,18.704 30.679,17.029 ; IC6.26@31.587,16.67 30.828,16.67 30.679,16.818 30.679,17.029 ; IC6.25@31.587,17.178 30.828,17.178 30.679,17.029 ; IC6.21@33.721,17.813 33.721,19.246 v1(34.95,20.475)
  L3 w0.254: v1(31.2,20.425) 31.225,20.45 34.925,20.45 v1(34.95,20.475)
  Bottom Layer w0.254: 31.2,18.975 v1(31.2,20.425)
  Bottom Layer w0.508: L5.1@30.375,18.975 31.2,18.975 C50.2@32.025,18.975 C51.2@32.025,17.675
+1V2: C7.2 C8.2 C13.2 IC1.5 IC1.30 R6.1 U2.1 | length 38.2
  Top Layer w0.254: U2.1@4.65,9.3 4.927,9.023 5.802,9.023 C13.2@5.925,8.9 6.55,8.9 6.825,9.175 6.825,10.3 6.025,11.1 v1(6.025,11.525) ; v1@10.85,23.375 v1(10.85,23.4) 10.85,23.425 11.6,24.175 12.5,24.175 13.084,23.591 13.084,23.116 R6.1@13.15,23.05 ; IC1.5@12.15,14.425 12.15,13.475 v1(12.2,13.425) ; IC1.30@13.15,21.325 R6.1@13.15,23.05
  L3 w0.254: v1(6.025,11.525) 6.025,15.4 ; v1(10.85,23.4) 10.85,22.3 10.275,21.725 6.7,21.725 6.025,21.05 6.025,15.4 ; v1(12.2,13.425) 10.25,15.375 6.05,15.375 6.025,15.4
  Bottom Layer w0.254: C7.2@10.375,20.8 10.375,22.925 v1(10.85,23.4) ; 12.175,14.6 12.187,14.587 12.187,13.438 v1(12.2,13.425)
+1V2PLL: IC1.29 R6.2 | length 1.8
  Top Layer w0.254: IC1.29@13.65,21.325 13.65,22.45 14.077,22.877 14.077,22.927 R6.2@14.1,22.95
+1V8: C11.2 L4.2 U1.1 | length 3.9
  Bottom Layer w0.203: U1.1@7.75,8.1 7.75,7.775 8.1,7.425 8.1,6.55 8.15,6.5 8.15,4.975 8.252,4.873 8.477,4.873 C11.2@8.625,4.725
+1V8f: C33.2 C34.2 IC7.3 IC7.24 IC7.29 IC7.32 L4.1 | length 18
  Top Layer w0.254: v1@11.275,5.875 11.597,6.197 IC7.24@12.387,6.197 ; v1@15,4.45 15.029,4.479 IC7.29@15.029,5.562 ; IC7.32@16.528,5.562 16.528,4.672 v1@16.675,4.525 ; IC7.3@17.163,7.188 17.838,7.188 v1@18.075,7.425
  L3 w0.254: v1(11.25,5.875) 12.661,4.465 v1(15.04,4.465) 15.057,4.482 16.682,4.482 v1(16.7,4.5) 16.7,6.05 v1(18.15,7.5)
  Bottom Layer w0.254: L4.1@9.975,6.475 10.7,6.475 11.25,5.925 v1(11.25,5.875) ; C33.2@10,4.75 C34.2@11.35,4.75 v1@11.35,5.722
+2V5: C9.2 D1.1 IC1.24 | length 5.2
  Top Layer w0.254: IC1.24@16.35,20.625 17.1,20.625 17.25,20.775 v1(17.25,21.075)
  Bottom Layer w0.254: C9.2@15.1,20.8 16.922,20.8 17.197,21.075 v1(17.25,21.075) 18.775,21.075 D1.1@18.85,21
+3V3: C1.2 C2.2 C3.2 C4.2 C5.2 C6.2 C10.2 C12.2 C14.1 C15.1 C16.1 C17.2 C35.1 C42.2 C43.2 C56.1 D1.2 IC1.1 IC1.22 IC1.33 IC2.5 IC3.5 IC4.3 IC4.7 IC4.8 IC5.1 IC7.13 IC8.A9 LED2.2 P1.1 P1.17 R3.1 R4.2 R8.2 R9.2 R10.2 R11.1 R12.1 R13.2 R14.1 U1.3 U1.4 U2.3 U2.4 Y1.4 | length 200.3
  Top Layer w0.254: v1(1.775,10.725) 1.813,10.688 1.888,10.688 2.152,10.423 2.152,9.923 2.275,9.8 C12.2@2.325,9.8 3.224,9.8 3.225,9.801 ; U2.4@3.7,9.3 3.675,9.275 3.374,9.275 3.225,9.424 3.225,9.801 ; U2.3@3.7,9.95 3.374,9.95 3.225,9.801 ; v1@9.9,13.575 9.9,13.879 10.15,14.129 IC1.1@10.15,14.425 ; v1@11.625,22.25 11.65,22.225 IC1.33@11.65,21.325 ; IC7.13@14.521,10.338 14.521,11.096 v1@14.525,11.1 ; IC1.22@16.35,19.625 v1(17.25,19.625) ; IC5.1@20.575,11.025 21.825,11.025 21.9,10.95 ; v1@21.225,19.55 21.325,19.65 v1(21.35,19.65) 21.35,19.685 22.39,20.725 IC4.3@22.39,21.162 22.37,21.182 22.37,22.905 C16.1@22.362,22.912 ; v1@22.05,12.85 23.35,12.85 23.75,13.25 R14.1@23.75,13.8 23.705,13.845 23.705,15.693 IC4.7@23.66,15.738 23.66,17.101 23.809,17.25 24.751,17.25 24.9,17.101 24.9,15.768 IC4.8@24.93,15.738 ; v1(22.075,12.825) 22.1,12.8 22.1,10.925 v1(22.125,10.9) 22.125,9.403 22.325,9.203 v1(22.325,9.15) ; C16.1@22.35,22.925 C16.1@22.362,22.912 ; R13.2@23.75,22.9 23.737,22.912 C16.1@22.362,22.912 ; IC8.A9@51.95,14.95 52.95,14.95 53.8,15.8 54.138,15.8 54.175,15.837 54.175,17.925 55.125,18.875 55.125,20.975 v1(55.15,21) 55.925,21 57.025,19.9 IC2.5@59.45,19.9 60.175,19.9 60.525,20.25 60.525,21.625 60.35,21.8 C14.1@60.35,22.425
  Top Layer w0.635: v1(0.5,18.35) 0.5,17.322 0.872,16.95 1.319,16.95 LED2.2@1.325,16.945
  L3 w0.254: v1(11.65,22.375) 17.575,22.375 18.425,21.525 18.425,20.469 17.59,19.634 17.259,19.634 v1(17.25,19.625) ; v1(21.35,19.65) 27.175,19.65 28.675,21.15 29.65,21.15 v1(30.175,20.625)
  L3 w0.305: v1(30.175,20.625) 30.175,19.85 30.4,19.625 51,19.625 52.213,18.413 52.213,17.937 52.5,17.65 53.3,17.65 53.625,17.975 v1@53.625,18.325
  Bottom Layer w0.203: U1.3@7.1,9.05 7.1,9.381 7.219,9.5 7.575,9.5 7.631,9.5 7.75,9.381 U1.4@7.75,9.05
  Bottom Layer w0.254: 7.575,9.5 7.575,10.175 9.925,12.525 ; C3.2@8.825,14.775 9.977,14.775 C4.2@10.15,14.775 10.1,14.775 9.977,14.652 9.977,14.602 9.925,14.55 v1(9.925,13.5) 9.925,12.525 ; v1(11.65,22.375) 11.663,22.362 11.663,20.813 C2.2@11.675,20.8 C1.2@12.975,20.8 ; v1(14.525,11.15) 14.525,10.288 14.575,10.238 ; D1.2@20.55,21 20.55,20.149 20.401,20 ; v1(21.35,19.65) 21.135,19.65 20.784,20 20.401,20 ; v1(22.075,12.825) C17.2@22.075,11.875 20.75,11.875 19.25,13.375 17.95,13.375 16.2,15.125 C5.2@16.2,17.15 C6.2@16.2,18.475 16.2,19.05 16.775,19.625 v1(17.25,19.625) 18.125,19.625 18.5,20 20.401,20 ; v1@22.075,12.85 21.825,13.1 21.825,13.325 ; v1@22.3,9.125 22.05,9.375 20.8,9.375 19.925,10.25 C43.2@15.25,10.25 15.238,10.238 14.575,10.238 ; C15.1@23.675,16.425 23.675,14.775 23.548,14.648 23.147,14.648 IC3.5@23.124,14.625 22.3,14.625 21.875,14.2 R11.1@21.825,14.2 21.825,13.325 ; R12.1@26.1,14.05 26.01,13.96 25.61,13.96 24.975,13.325 21.825,13.325 ; R9.2@48.275,19.775 48.275,21.1 ; R8.2@48.275,21.875 48.275,21.1 ; v1(53.6,18.325) 53.6,18.378 53.975,18.753 R4.2@53.975,20.25 53.975,21.075 ; R10.2@53.975,21.9 53.975,21.075 ; v1(55.15,21) 54.05,21 53.975,21.075 ; 9.925,12.525 12.225,10.225 C42.2@13.9,10.225 13.913,10.238 14.575,10.238 ; 48.275,21.1 48.3,21.075 53.975,21.075
  Bottom Layer w0.381: C10.2@5.881,9.381 7.1,9.381
  Bottom Layer w0.508: P1.17@28.81,25.125 28.81,23.465 30.825,21.45 ; v1(30.175,20.625) 30.825,21.275 30.825,21.45 ; R3.1@32.7,21.45 30.825,21.45
  Bottom Layer w0.635: Y1.4@4.4,17.251 4.375,17.226 4.375,15.747 4.003,15.375 ; C56.1@5.225,14.875 4.725,15.375 4.003,15.375 ; C10.2@5.881,9.381 3.119,9.381 v1(1.775,10.725) 0.5,12 0.5,15.747 ; P1.1@8.49,25.125 6.9,25.125 5.725,23.95 0.872,23.95 0.5,23.578 v1(0.5,18.35) 0.5,15.747 ; 0.5,15.747 0.872,15.375 4.003,15.375
+5V: C32.1 C36.1 IC8.A6 IC8.F4 K3.1 L5.2 L6.1 P1.2 P1.4 | length 85.4
  Top Layer w0.254: v1(45.725,12.85) C36.1@45.725,13.825 50.075,13.825 ; IC8.F4@49.45,12.45 50.075,13.075 50.075,13.825 ; C32.1@50.375,16.925 50.375,15.025 IC8.A6@50.45,14.95 50.075,14.575 50.075,13.825
  Top Layer w0.508: v1@29.075,20.575 v1(30.975,22.475)
  L3 w0.508: v1(28.625,11.55) 31.175,11.55 32.175,10.55 38.075,10.55 38.15,10.625 41.775,10.625 44,12.85 v1(45.725,12.85)
  Bottom Layer w0.508: P1.2@8.49,27.665 11.03,27.665 11.19,27.665 12.925,29.4 29.702,29.4 30,29.102 30,23.5 v1@31,22.5 ; L6.1@28.7,10.2 28.637,10.262 28.637,18.912 L5.2@28.575,18.975 28.575,20.1 v1(29.075,20.6) ; K3.1@41.45,1.775 42.8,1.775 43.475,2.45 43.475,5.575 43.475,9.3 44.425,10.25 44.425,12.175 45.1,12.85 v1(45.725,12.85)
+HV: C44.2 C45.2 IC8.P6 K3.2 | length 18.9
  Top Layer w0.305: K3.2@41.45,4.315 43.615,4.315 45.85,6.55 49.515,6.55 50.45,7.485 IC8.P6@50.45,8.45
  Bottom Layer w0.305: C44.2@41.15,10.9 41.315,10.735 41.315,8.15 ; K3.2@41.45,4.315 41.315,4.45 41.315,8.15 ; C45.2@42.275,8.15 41.315,8.15
-HV: C54.1 C55.1 IC8.P9 K4.2 | length 16.7
  Top Layer w0.254: 50.85,6.475 51.95,7.575 IC8.P9@51.95,8.45
  Top Layer w0.305: K4.2@45.925,4.34 46.072,4.487 46.072,5.721 46.251,5.9 50.275,5.9 50.85,6.475
  Bottom Layer w0.305: C55.1@44.75,8.15 45.85,8.15 45.925,8.225 ; C54.1@45.87,10.875 45.925,10.82 45.925,8.225 ; K4.2@45.925,4.34 45.925,8.225
ADC_CLK: IC1.37 IC7.1 | length 23.8
  Top Layer w0.254: v1@8.45,20.774 8.599,20.625 IC1.37@9.45,20.625 ; IC7.1@17.163,6.197 17.928,6.197 18.1,6.025 v1@18.1,5.8
  L3 w0.254: v1(8.375,20.775) 11.075,20.775 14.075,17.775 14.075,15.85 17.025,12.9 17.025,10.95 19.125,8.85 19.125,6.725 v1(18.1,5.7)
BT_TRIG: IC1.31 P1.8 SW1.3 SW1.4 | length 112.6
  Top Layer w0.254: v1(12.226,23.451) 12.249,23.451 12.65,23.05 IC1.31@12.65,21.325 ; v1(57.725,15.9) 57.723,15.898 57.723,15.199 58.551,15.199 SW1.3@58.575,15.223 SW1.4@63.725,15.223
  L3 w0.254: v1(8.475,23.225) 7.025,23.225 5.25,21.45 5.25,8.725 10.05,3.925 10.075,3.925 10.925,3.075 54.075,3.075 57.8,6.8 57.8,15.686 57.763,15.724 57.763,15.809 v1@57.654,15.918 ; v1(12.226,23.451) 12.225,28.525 13.05,29.35 15.4,29.35 16.103,28.647 16.103,27.672 P1.8@16.11,27.665
  Bottom Layer w0.254: v1(8.475,23.225) 8.975,23.225 9.725,23.975 9.725,25.9 10.35,26.525 15.1,26.525 15.617,27.042 15.617,27.06 16.11,27.553 P1.8@16.11,27.665
BT_USER: IC1.25 P1.10 SW2.3 SW2.4 | length 72
  Top Layer w0.254: IC1.25@15.65,21.325 16.35,21.325 16.95,21.925 17.925,21.925 19.825,23.825 19.825,26.375 18.65,27.55 P1.10@18.65,27.665 ; v1(58.55,12.2) 58.55,11.35 SW2.3@58.575,11.325 SW2.4@63.725,11.325
  L3 w0.254: P1.10@18.65,27.665 18.65,27.65 19.85,26.45 57.95,26.45 60.55,23.85 60.55,13.425 60.125,13 59.25,13 v1@58.525,12.275
D2: IC1.38 IC7.11 | length 17.9
  Top Layer w0.254: v1(7.65,20.75) 8.275,20.125 IC1.38@9.45,20.125 ; IC7.11@15.537,10.338 15.562,10.363 15.562,10.962 v1(16.053,11.453)
  L3 w0.254: v1(7.65,20.75) 7.65,20.725 8.175,20.2 11.036,20.2 13.525,17.711 13.525,15.786 16.15,13.161 16.15,11.55 v1(16.053,11.453)
D3: IC1.42 IC7.12 | length 15.6
  Top Layer w0.254: v1(7.775,18) 7.828,18 7.953,18.125 IC1.42@9.45,18.125 ; IC7.12@15.029,10.338 15.029,11.079 15.537,11.587 15.537,11.897 v1(15.573,11.933)
  L3 w0.254: v1(7.775,18) 12.45,18 13.091,17.359 13.091,15.606 15.575,13.122 15.575,11.935 v1(15.573,11.933)
D4: IC1.43 IC7.14 | length 13.3
  Top Layer w0.254: v1(7.525,17.225) 7.578,17.225 7.872,17.519 8.188,17.519 8.294,17.625 IC1.43@9.45,17.625 ; IC7.14@14.013,10.338 14,10.351 14,11.625 v1(14.025,11.65)
  L3 w0.254: v1(7.525,17.225) 9.975,17.225 13.25,13.95 13.25,12.082 13.679,11.653 14.022,11.653 v1(14.025,11.65)
D5: IC1.4 IC7.15 | length 6.8
  Top Layer w0.254: IC1.4@11.65,14.425 11.65,11.425 11.825,11.25 12.25,11.25 12.95,11.95 13.382,11.95 13.53,11.801 IC7.15@13.53,10.338
D6: IC1.45 IC7.16 | length 11
  Top Layer w0.254: v1@7.85,16 7.896,16 8.521,16.625 IC1.45@9.152,16.625 ; v1(13.012,11.332) 13.022,11.322 IC7.16@13.022,10.338
  L3 w0.254: v1(7.8,15.975) 10.525,15.975 12.8,13.7 12.8,11.598 12.985,11.413 12.985,11.36 v1(13.012,11.332)
D7: IC1.46 IC7.17 | length 9.9
  Top Layer w0.254: v1@7.775,14.65 7.775,15.265 8.635,16.125 IC1.46@9.45,16.125 ; v1(10.95,10.525) 11.772,9.703 IC7.17@12.387,9.703
  L3 w0.254: v1@7.75,14.65 9.375,13.025 9.375,12.1 v1(10.95,10.525)
  other v1: 7.8,14.65
D8: IC1.47 IC7.18 | length 9.6
  Top Layer w0.254: v1(8.6,12.275) 8.6,15.476 8.749,15.625 IC1.47@9.45,15.625 ; v1(10.9,9.2) 10.905,9.195 IC7.18@12.387,9.195
  L3 w0.254: v1(8.6,12.275) 8.6,11.5 v1(10.9,9.2)
D9: IC1.48 IC7.19 | length 9.2
  Top Layer w0.254: IC1.48@9.45,15.125 9.277,15.125 9.275,15.123 9.275,9.512 10.075,8.712 IC7.19@12.387,8.712
D10: IC1.2 IC7.20 | length 9.1
  Top Layer w0.254: v1(10.55,13.175) 10.65,13.275 IC1.2@10.65,14.425 ; v1@10.7,8.2 10.704,8.204 IC7.20@12.387,8.204
  L3 w0.254: v1(10.55,13.175) 10.55,11.75 11.65,10.65 11.65,8.525 11.35,8.225 v1(10.725,8.225)